# Altium PCB WiF14Tao.PcbDoc
Units mil, origin at the board's own origin, x right, y up, seen from the top; angles counter-clockwise.
Board outline 2362.2 x 4724.41 mil, 2 copper layers (TopLayer, BottomLayer); 18 components, 28 nets, 141 pads, 63 vias.
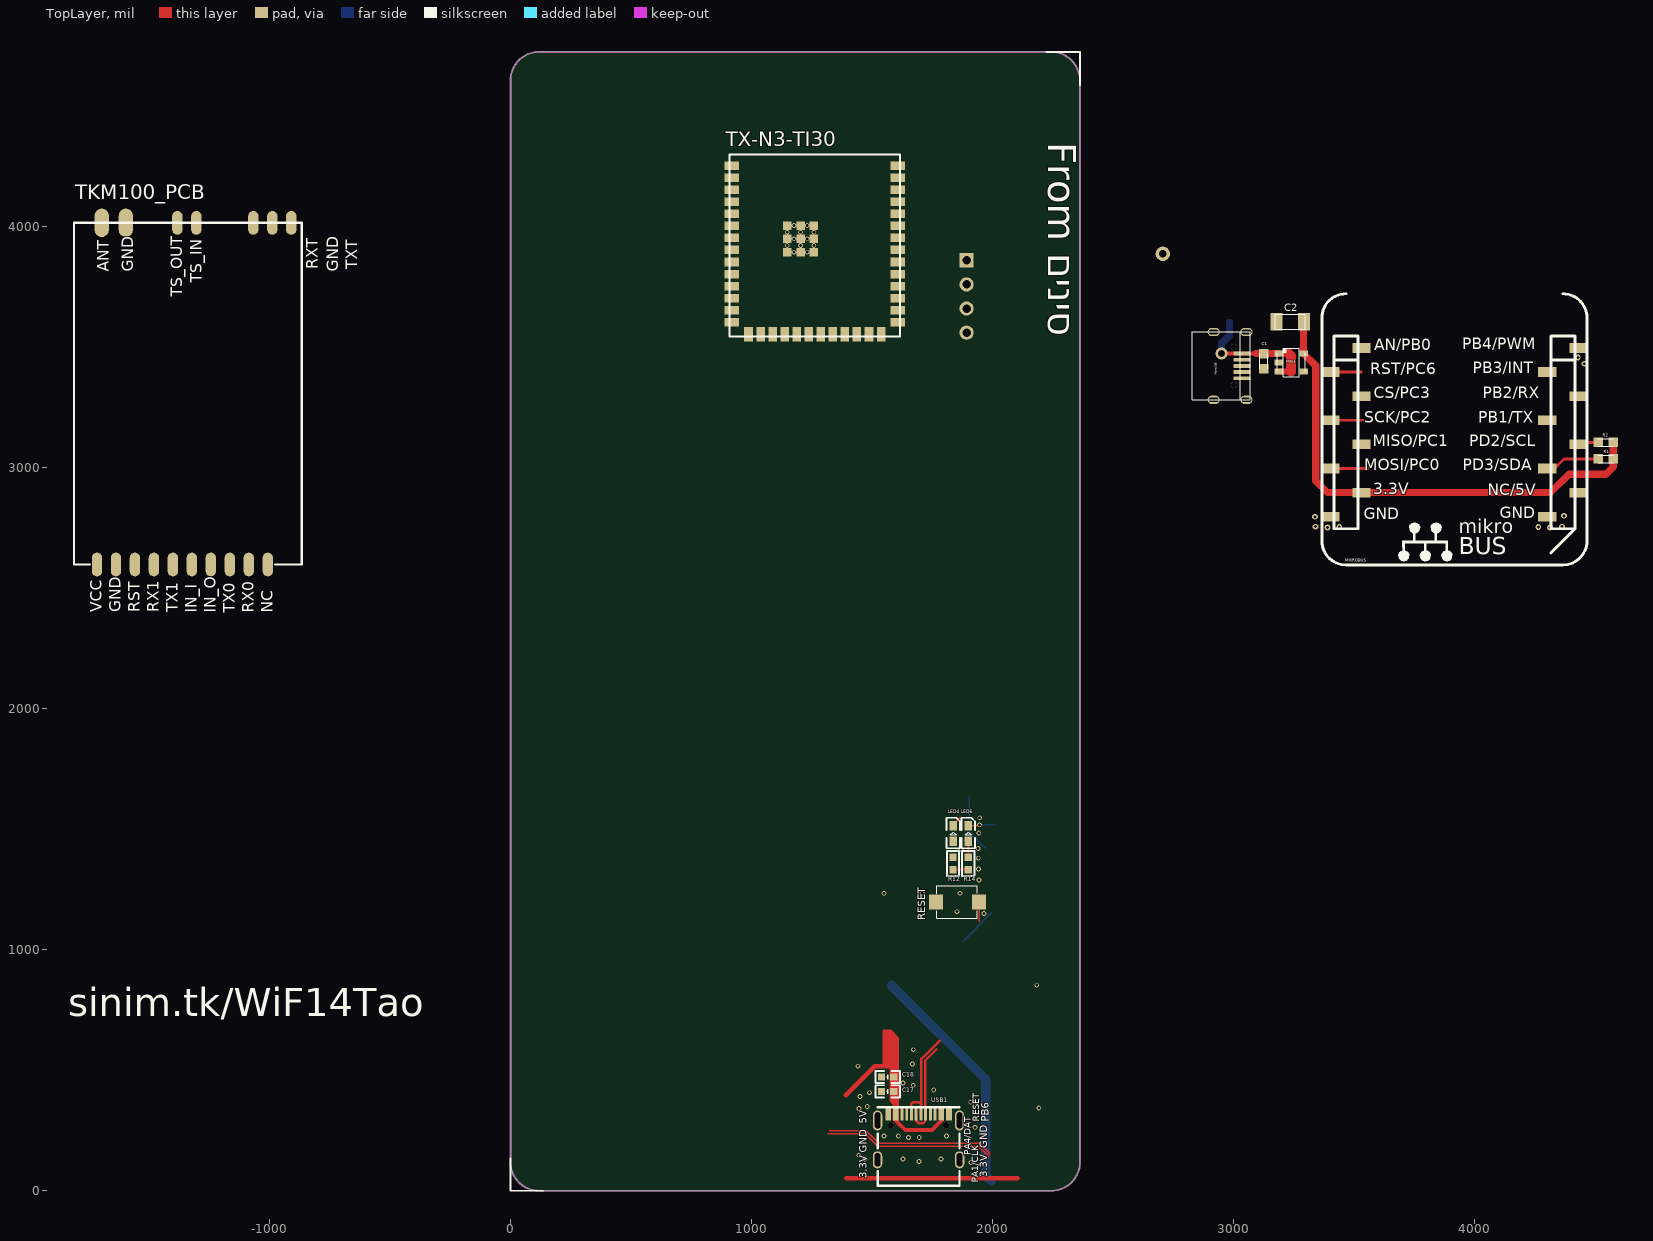
[diagram p0: TopLayer view]
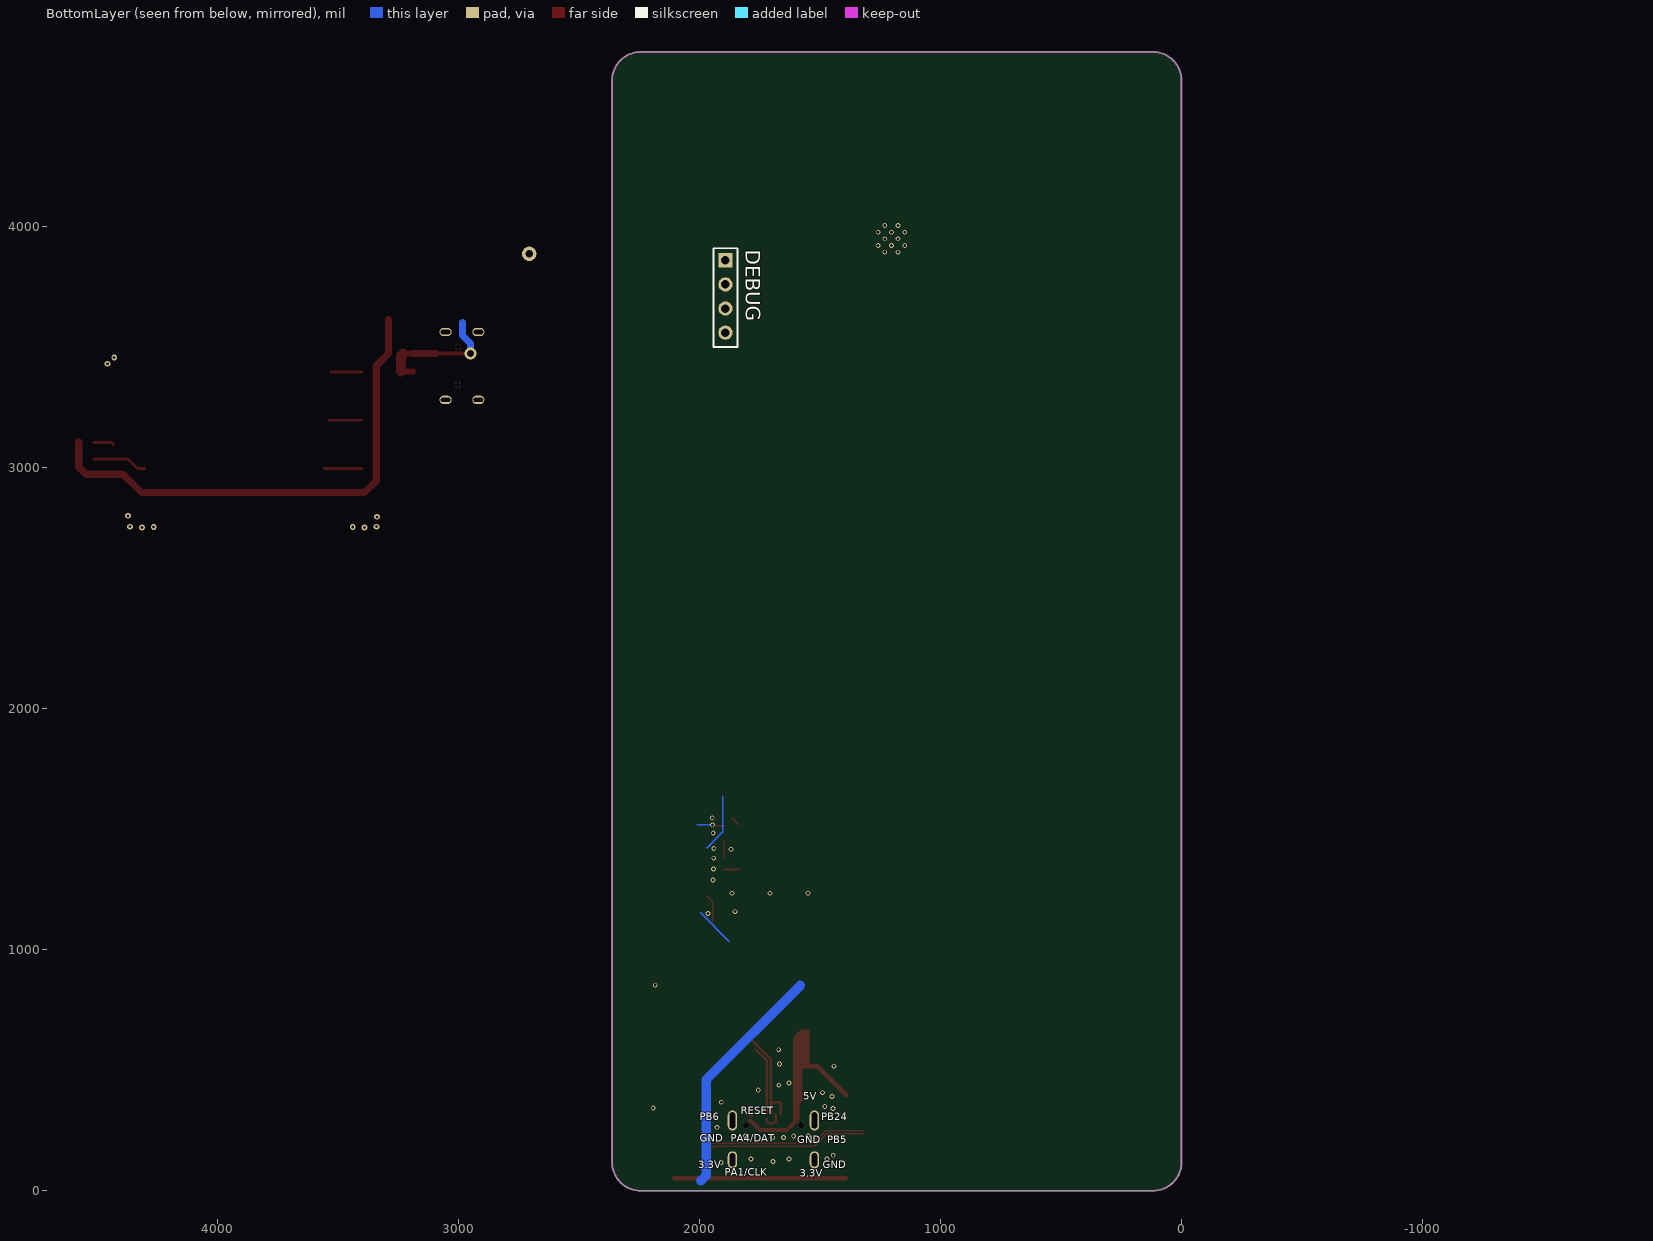
[diagram p1: BottomLayer view, seen from below]

## Layer stack, top to bottom
TopLayer: signal copper 1.4
Dielectric: core 12.6, FR-4, Dk 4.8
BottomLayer: signal copper 1.4

## Board outline
0,118.11 0,4606.3 cw(c118.11,4606.3) 118.11,4724.41 2244.09,4724.41 cw(c2244.09,4606.3) 2362.2,4606.3 2362.2,118.11 cw(c2244.09,118.11) 2244.09,0 118.11,0 cw(c118.11,118.11)

## Design rules (kind name [scope] priority, off if disabled: settings)
Clearance Clearance_1 [(InPoly) vs (IsWire) Or (IsPad) Or (IsVia) Or (IsFill) Or (InPoly)] p1: gap=10
Clearance [All] p2: gap=6
Clearance Clearance_2 [Inpoly vs InNet('NetC17_1')] p3: gap=12
ComponentClearance [All] p1 off: gap=10 collisioncheckmode=3 verticalgap=10 showdistances=FALSE
FabricationTestPointUsage TestPointUsage [All] p1: valid=0 allowmultiple=FALSE
FabricationTestpoint Testpoint [All] p1: side=3 testpointundercomponent=TRUE minsize=40 maxsize=100 preferedsize=60 minholesize=20 maxholesize=40 preferedholesize=32 testpointgrid=1 allowsidetop=TRUE allowsidebottom=TRUE usegrid=TRUE gridtolerance=0.01
FanoutControl Fanout_Default [All] p1: bgadir=Out bgaviamode=Centered fanoutstyle=Auto fanoutdirection=Alternating viagrid=1 // Fanout_Default (Default Rule)
FanoutControl Fanout_Small [(CompPinCount < 5)] p2: bgadir=Out bgaviamode=Centered fanoutstyle=Auto fanoutdirection=OutThenIn viagrid=1 // Fanout_Small (Default Rule)
FanoutControl Fanout_LCC [IsLCC] p4: bgadir=Out bgaviamode=Centered fanoutstyle=Auto fanoutdirection=Alternating viagrid=1 // Fanout_LCC (Default Rule)
FanoutControl Fanout_BGA [IsBGA] p5: bgadir=Out bgaviamode=Centered fanoutstyle=Auto fanoutdirection=Alternating viagrid=1 // Fanout_BGA (Default Rule)
PolygonConnect PolygonConnect_Via [ISVIA] p1: connectstyle=Direct reliefconductorwidth=10 reliefentries=4 polygonreliefangle="90 Angle"
PolygonConnect [All] p2: connectstyle=Direct reliefconductorwidth=21 reliefentries=4 polygonreliefangle="90 Angle"
RoutingPriority [All] p1: routingpriority=4
RoutingVias [All] p1: holewidth=16 width=26 viastyle="Through Hole" minholewidth=12 minwidth=18 maxholewidth=28 maxwidth=50
SilkscreenOverComponentPads [IsPad] p1: minsilkscreentomaskgap=10
SolderMaskExpansion Ispad2 [ispad] p1: expansion=0
SolderMaskExpansion IsPad [IsPad] p2: expansion=0
SolderMaskExpansion via [isvia] p3: expansion=-20
Width [All] p1: maxlimit=100 minlimit=6 preferedwidth=10
19 further rules are at their usual default settings.

## Classes and differential pairs
component class ΖΥΓΟΝ_M220P: C1 C2 MICROUSB MIKROBUS R1 R2 RT9013

## Components (designator, comment, footprint, x,y, rotation, side; value= is the part's Value field where it differs from the comment)
C1 "2.2u" 0603 3124.88,3473.16 r270 top
C2 "22uF" 1206 3235,3604.98 r180 top
C17 "0.1uF" "C 0603_L" 1564.59,412 r0 top
C18 "10UF" "C 0603_L" 1564.59,472 r0 top
DEBUG "" DEBUG 1892,3860 r270 bottom
LED4 "" LED0603 1836.5,1482 r90 top
LED6 "" LED0603 1899,1482 r90 top
MicroUSB "" MicroUSB 2844.46,3421.98 r0 top locked
MIKROBUS "" MIKROBUS 3916,3146.39 r0 top
R1 "3k" 0603 4575,3035.98 r180 top
R2 "3k" 0603 4575,3104.98 r180 top
R12 "4.7K" "R 0603_L" 1835.67,1357.59 r90 top
R14 "4.7K" "R 0603_L" 1899,1357.59 r90 top
RESET "SW PUSHBUTTON" 正按小龟 1944,1198.18 r180 top
RT9013 "" SGM2028 3239,3435.98 r270 top
TKM100_PCB "" TKM100_PCB -1811,2598 r0 top
TX-N3-TI30 "" TX-N3-TI30 908,3544 r0 top
USB1 "USB_TYPE_C_16Pin" USB-C-16PIN-1 1521.36,289.26 r0 top

## Footprints (in the part's own frame and the unit in brackets; to place one, negate y for a bottom-side part, rotate by r counter-clockwise, add the part's x,y. Pads: shape width x height; smd on the part's side, far side on the other; paste and mask are expansions set on the pad)
0603 [mm]
  rect 1x1 smd: 1(0,0) 2(1.6,0)
  silkscreen extent 0,-0.4 1.6,0.4
1206 [mm]
  rect 1.3x1.85 smd: 1(-1.45,0) 2(1.45,0)
  silkscreen extent -1.6,-0.8 1.6,0.8
"C 0603_L" [mil]
  rect 30x30 smd: 1(-25.59,0) 2(25.59,0)
  silkscreen extent -51,-26 51,26, body extent -31,-16 31,16, height 32
DEBUG [mm]
  rect 1.5x1.5 hole 0.9: 1(0,0)
  round 1.5 hole 0.9: 2(2.54,0) 3(5.08,0) 4(7.62,0)
  silkscreen extent -1.27,-1.27 9.14,1.27
LED0603 [mm]
  rect 1x0.8 smd: 1(-0.81,0) 2(0.81,0)
  silkscreen extent -1.55,-0.71 1.65,0.71, body extent -0.81,-0.4 0.81,0.4, height 0.6
MicroUSB [mm]
  rect 1.8x0.4 smd: 1(4.85,1.3) 2(4.85,0.65) 3(4.85,0) 4(4.85,-0.65) 5(4.85,-1.3)
  oval 1.27x0.889 hole 0.45 slot 1.016 at 0 deg: o(1.85,-3.575) o(1.85,3.575) o(5.3,-3.575) o(5.3,3.575)
  silkscreen extent -0.4,-3.57 5.7,3.57
MIKROBUS [mm]
  rect 1.9x1.02 smd: 1(-9.78,8.89) 2(-13.08,6.35) 3(-9.78,3.81) 4(-13.08,1.27) 5(-9.78,-1.27) 6(-13.08,-3.81) 7(-9.78,-6.35) 8(-13.08,-8.89) 9(9.78,-8.89) 10(13.08,-6.35) 11(9.78,-3.81) 12(13.08,-1.27) 13(9.78,1.27) 14(13.08,3.81) 15(9.78,6.35) 16(13.08,8.89)
  silkscreen extent -13.97,-13.97 13.97,14.6
"R 0603_L" [mil]
  rect 30x30 smd: 1(-25.59,0) 2(25.59,0)
  silkscreen extent -51,-26 51,26, body extent -31,-16 32,16, height 16
SGM2028 [mm]
  rect 0.6x0.9 smd: 1(-0.95,-1.304) 2(0,-1.304) 3(0.95,-1.304) 4(0.95,1.304) 5(-0.95,1.304)
  silkscreen extent -1.51,-1.5 1.51,1.5
TKM100_PCB [mm]
  oval 1.1x2.5 smd: 1(2.426,0) 2(4.426,0) 3(6.426,0) 4(8.426,0) 5(10.426,0) 6(12.426,0) 7(14.426,0) 8(16.426,0) 9(18.426,0) 10(20.426,0) 11(22.9,36) 12(20.9,36) 13(18.9,36) 14(12.9,36) 15(10.9,36)
  oval 1.5x3 smd: 16(5.465,36) 17(2.925,36)
  silkscreen extent 0,0 24,36
TX-N3-TI30 [mm]
  rect 0.9x0.9 smd: 0(6.1,8.89) 0(6.1,10.29) 0(6.1,11.69) 0(7.5,8.89) 0(7.5,10.29) 0(7.5,11.69) 0(8.9,8.89) 0(8.9,10.29) 0(8.9,11.69)
  rect 1.5x0.9 smd: 1(0.25,18.01) 2(0.25,16.74) 3(0.25,15.47) 4(0.25,14.2) 5(0.25,12.93) 6(0.25,11.66) 7(0.25,10.39) 8(0.25,9.12) 9(0.25,7.85) 10(0.25,6.58) 11(0.25,5.31) 12(0.25,4.04) 13(0.25,2.77) 14(0.25,1.5) 27(17.75,1.5) 28(17.75,2.77) 29(17.75,4.04) 30(17.75,5.31) 31(17.75,6.58) 32(17.75,7.85) 33(17.75,9.12) 34(17.75,10.39) 35(17.75,11.66) 36(17.75,12.93) 37(17.75,14.2) 38(17.75,15.47) 39(17.75,16.74) 40(17.75,18.01)
  rect 0.9x1.5 smd: 15(2.015,0.25) 16(3.285,0.25) 17(4.555,0.25) 18(5.825,0.25) 19(7.095,0.25) 20(8.365,0.25) 21(9.635,0.25) 22(10.905,0.25) 23(12.175,0.25) 24(13.445,0.25) 25(14.715,0.25) 26(15.985,0.25)
  silkscreen extent 0,0 18,19.2
USB-C-16PIN-1 [mm]
  oval 1x2.099 hole 0.6 slot 1.7 at 90 deg: 1(0.034,0.061) 2(8.674,0.061)
  oval 1x1.799 hole 0.6 slot 1.4 at 90 deg: 3(0.034,-4.088) 4(8.674,-4.088)
  rect 0.6x1.35 smd: A1B12(1.154,0.736) A4B9(1.954,0.736) B1A12(7.554,0.736) B4A9(6.754,0.736)
  rect 0.3x1.35 smd: A5(3.104,0.736) A6(4.104,0.736) A7(4.604,0.736) A8(2.604,0.736) B5(6.104,0.736) B6(5.104,0.736) B7(3.604,0.736) B8(5.604,0.736)
  round 0.65 hole 0.65 unplated: ""(1.464,-0.438) ""(7.244,-0.438)
  silkscreen extent 0.04,-6.81 8.67,1.45
正按小龟 [mm]
  rect 1.5x1.6 smd: 1(0,0) 2(4.55,0)
  silkscreen extent 0.2,-1.7 4.48,1.73

## Part data
C1 C2: library part C
C17 C18: library part Cap, "Cap"
MicroUSB: library part MICROUSB
MIKROBUS: library part MIKROBUS
R1 R2: library part R
R12 R14: library part Res1, "Resisto"
RT9013: library part SGM2028

## Free pads (board coordinates)
  round 60 hole 30: 0(2706,3887)

## Via types
v1: diameter 19.68, hole 11.81, TopLayer to BottomLayer, tented both sides, 38 vias
v2: diameter 19.68, hole 11.81, TopLayer to BottomLayer, 12 vias
v3: diameter 24, hole 12, TopLayer to BottomLayer, 10 vias
v4: diameter 25.59, hole 25.59, TopLayer to BottomLayer, 2 vias
v5: diameter 50, hole 28, TopLayer to BottomLayer, 1 vias

## Nets (pads, with @x,y where several pads share a name; then routed paths per layer and width w, separated by ;. In a path a pad name is that pad's centre, name@x,y a point inside that pad or via, vN(x,y) a via of type N, cw(c..) or ccw(c..) an arc to the next point about the centre after c; other vN are vias at no path point)
5V: C1.1 MicroUSB.1 RT9013.1 RT9013.3 | length 548.3
  TopLayer w15.75: v5@2950,3473.16 MicroUSB.1 3094,3472.98
  TopLayer w23.62: RT9013.3 3238,3398.58 ; RT9013.1 3228.6,3473.38
  TopLayer w30: 3094,3473.38 RT9013.1
  TopLayer w40: 3228.6,3473.38 3238,3463.98 3238,3398.58
  BottomLayer w30: v5(2950,3473.98) 2950,3514.98 2983,3547.98 2983,3600.98
GND: C1.2 C2.2 MicroUSB.5 MicroUSB.o MIKROBUS.8 MIKROBUS.9 RT9013.2
  other v3: 3390,2751.98 4312.08,2751.98 3438,2753.98 4264.08,2753.98 3340,2754.98 4362.08,2754.98 3338,2795.98 4370,2799.98
PA0: 
PA4: 
PA7: 
PA8: 
PB0: MIKROBUS.1
PB1: MIKROBUS.13
PB2: MIKROBUS.14
PB3: MIKROBUS.15
PB4: MIKROBUS.16
PC0: MIKROBUS.6 | length 155.4
  TopLayer w12: MIKROBUS.6 3556.41,2996.39
PC1: MIKROBUS.5
PC2: MIKROBUS.4 | length 133.4
  TopLayer w12: MIKROBUS.4 3534.41,3196.39
PC3: MIKROBUS.3
PC6: MIKROBUS.2 | length 128.4
  TopLayer w12: MIKROBUS.2 3529.41,3396.39
PC7: pad.0
PD2: MIKROBUS.12 R2.2 | length 84.6
  TopLayer w12: MIKROBUS.12 4439.55,3104.98 R2.2
PD3: MIKROBUS.11 R1.2 | length 227.4
  TopLayer w12: MIKROBUS.11 4331.41,2996.39 4371,3035.98 R1.2
PTI_DATA: 
PTI_FRAME: 
RST: 
SWCLK: 
SWDIO: 
SWO: 
UART_RX: 
  other v3: 4428,3456.98
UART_TX: 
  other v3: 4456,3430.98
VCC: C2.1 MIKROBUS.7 R1.1 R2.1 RT9013.5 | length 2093
  TopLayer w30: C2.1@3290.34,3614.23 C2.1@3290.34,3603.23 ; C2.1 C2.1@3290.34,3603.23 ; R2.1 R1.1 4575,3002.98 4545,2972.98 4391,2972.98 4314.41,2896.39 MIKROBUS.7 3389.59,2896.39 3341,2944.98 3341,3422.72 RT9013.5 C2.1@3290.34,3603.23
pads on no net: C17.1 C17.2 C18.1 C18.2 DEBUG.1 DEBUG.2 DEBUG.3 DEBUG.4 LED4.1 LED4.2 LED6.1 LED6.2 MicroUSB.2 MicroUSB.3 MicroUSB.4 MIKROBUS.10 R12.1 R12.2 R14.1 R14.2 RESET.1 RESET.2 RT9013.4 TKM100_PCB.1 TKM100_PCB.2 TKM100_PCB.3 TKM100_PCB.4 TKM100_PCB.5 TKM100_PCB.6 TKM100_PCB.7 TKM100_PCB.8 TKM100_PCB.9 TKM100_PCB.10 TKM100_PCB.11 TKM100_PCB.12 TKM100_PCB.13 TKM100_PCB.14 TKM100_PCB.15 TKM100_PCB.16 TKM100_PCB.17 TX-N3-TI30.0 TX-N3-TI30.1 TX-N3-TI30.2 TX-N3-TI30.3 TX-N3-TI30.4 TX-N3-TI30.5 TX-N3-TI30.6 TX-N3-TI30.7 TX-N3-TI30.8 TX-N3-TI30.9 TX-N3-TI30.10 TX-N3-TI30.11 TX-N3-TI30.12 TX-N3-TI30.13 TX-N3-TI30.14 TX-N3-TI30.15 TX-N3-TI30.16 TX-N3-TI30.17 TX-N3-TI30.18 TX-N3-TI30.19 TX-N3-TI30.20 TX-N3-TI30.21 TX-N3-TI30.22 TX-N3-TI30.23 TX-N3-TI30.24 TX-N3-TI30.25 TX-N3-TI30.26 TX-N3-TI30.27 TX-N3-TI30.28 TX-N3-TI30.29 TX-N3-TI30.30 TX-N3-TI30.31 TX-N3-TI30.32 TX-N3-TI30.33 TX-N3-TI30.34 TX-N3-TI30.35 TX-N3-TI30.36 TX-N3-TI30.37 TX-N3-TI30.38 TX-N3-TI30.39 TX-N3-TI30.40 USB1. USB1.1 USB1.2 USB1.3 USB1.4 USB1.A1B12 USB1.A4B9 USB1.A5 USB1.A6 USB1.A7 USB1.A8 USB1.B1A12 USB1.B4A9 USB1.B5 USB1.B6 USB1.B7 USB1.B8
copper on no net: | length 5296
  TopLayer w6: 1316.66,237 1471.7,237 1523.7,185 1533.64,185 1941.42,185 1985.67,140.75 ; 1321.63,249 1476.67,249 1528.67,197 1946.39,197 1990.64,152.75 ; 1836.5,1517.83 1866.38,1547.71 ; 1899,1513.89 1941.64,1513.89 v1(1945.74,1517.99) ; 1944,1116.99 1944,1198.18 1969.72,1223.9
  TopLayer w7.87: 1835.67,1332 1899,1332 ; 1899,1383.19 1899,1450.11
  TopLayer w10: 1663.25,318.26 1663.25,361.14 1669.11,367 1694.76,367 1702.62,359.14 ; 1682.94,318.26 1683.84,317.35 1683.84,289 1692.16,280.68 1713.08,280.68 1719.53,287.12 1719.53,294.81 1722.31,297.59 ; 1702.62,345.69 1702.62,359.14 ; 1722.31,318.26 1721.4,319.16 1721.4,344.57 1720.76,345.21 1720.76,540.27 1767.41,586.92 ; 1781.96,624.1 1704.76,546.9 1704.76,359.14 1704.76,345.69 1703.53,344.45 1703.53,319.16 1702.62,318.26 1702.62,359.14
  TopLayer w15.75: 1598.29,318.26 1602.23,299.28 1604.39,288.86 ccw(c1617.97,291.68) 1606.43,283.98 1608.25,281.25 1637.51,252 1749,252 1779.89,282.89 1779.89,283.05 1789.57,292.72
  TopLayer w19.68: 1391.03,396.09 1511.94,517 1598.45,517 ; 1392.59,52 1894,52 1894.37,51.63 2103.63,51.63 ; 1785.3,314.42 1787.27,318.26
  BottomLayer w6: 1875.72,1033.72 1997.06,1155.06 ; 1902.29,1638.8 1902.29,1488.55 1969.72,1421.12 ; v1(1945.74,1517.99) 2011.01,1517.99
  BottomLayer w39.37: 1581.09,851.91 1971.59,461.41 1971.59,63.78 1994.65,40.72
  other v1: 1910,117 1695,121 1470.97,131.8 1628.45,131.8 1785.93,131.8 1445,147 1651.58,221.39 1695.52,220.74 1549,227 1609,227 1809,227 1927,263 1445.49,341.56 2192,343 1480,350 1909,367 1450,391 1489,407 1756,418 1671,438 1628.45,446.76 1442,517 1668,526 1671.27,585.35 2183,853 1964,1150 1852,1158 1549.71,1234.17 1707.19,1234.17 1864.67,1234.17 1944,1289 1942,1335 1941,1380 1869,1417 1940,1420 1943,1484 1946.23,1547.71
  other v2: 1175.72,3894 1230.83,3894 1148.16,3921.56 1203.28,3921.56 1258.39,3921.56 1175.72,3949.12 1230.83,3949.12 1148.16,3976.68 1203.28,3976.68 1258.39,3976.68 1175.72,4004.24 1230.83,4004.24
  other v4: 3001.94,3343.24 3001.94,3500.72

## Keep-outs
KeepOutLayer:
  the board outline again, w7.87

## Other copper
TopLayer:
  region: 1609.87,291.67 1609.87,297 1611.09,634.91 1579,667 1544,667 1544,562 1544,517 1574,517 1574,372 1586.3,359.7 1586.3,329.04 1586.3,291.67 1604,277 1609,282

## Silkscreen, mask and mechanical layers (free items; w line width, h text height)
TopOverlay:
  lines w7.87: 0,134 0,0 134,0 ; 2224,4724.41 2362.2,4724.41 2362.2,4586.2
  text "From םיניס" at 2192,4350 h200 r270
  text "sinim.tk/WiF14Tao" at -1834,684 h200
  text "RESET" at 1954,287 h47.24 r90
  text "PB6" at 1994,287 h51.18 r90
  text "5V" at 1489,277 h51.18 r90
  text "GND" at 1989,177 h51.18 r90
  text "GND" at 1489,157 h51.18 r90
  text "PA4/DAT" at 1918.94,147.75 h47.24 r90
  text "3.3V" at 1989,57 h51.18 r90
  text "3.3V" at 1489,52 h51.18 r90
  text "PA1/CLK" at 1951.73,33.48 h47.24 r90
BottomOverlay:
  text "5V" at 1569.41,367.41 h51.18
  text "RESET" at 1829,307 h51.18
  text "PB24" at 1494,282 h51.18
  text "PB6" at 1999,282 h51.18
  text "PA4/DAT" at 1871,192 h51.18
  text "GND" at 1999,192 h51.18
  text "PB5" at 1469,187 h51.18
  text "GND" at 1594,187 h51.18
  text "GND" at 1489,82 h51.18
  text "3.3V" at 2004,82 h51.18
  text "PA1/CLK" at 1894,52 h51.18
  text "3.3V" at 1584,47 h51.18

## Text inside footprints (layer, text, board x,y; h text height)
MIKROBUS: TopOverlay "BUS" at 3933,2614.9 h121.5; TopOverlay "mikro" at 3933,2706.93 h99; TopOverlay "PB4/PWM" at 3949,3474.98 h80; TopOverlay "AN/PB0" at 3583,3470.98 h80; TopOverlay "NC/5V" at 4054,2867.98 h80; TopOverlay "GND" at 4104,2772.98 h80; TopOverlay "PB1/TX" at 4014,3169.98 h80; TopOverlay "PB2/RX" at 4033,3271.98 h80; TopOverlay "PB3/INT" at 3993,3373.98 h80; TopOverlay "PD2/SCL" at 3977,3071.98 h80; TopOverlay "GND" at 3540,2768.98 h80; TopOverlay "3.3V" at 3580,2871.98 h80; TopOverlay "MOSI/PC0" at 3541,2971.98 h80; TopOverlay "SCK/PC2" at 3542,3169.98 h80; TopOverlay "MISO/PC1" at 3578,3072.98 h80; TopOverlay "CS/PC3" at 3582,3271.98 h80; TopOverlay "RST/PC6" at 3566,3371.39 h80; TopOverlay "PD3/SDA" at 3951,2971.98 h80
TKM100_PCB: TopOverlay "TS_IN" at -1281,3768 h47.24 r90; TopOverlay "ANT" at -1666,3813 h47.24 r90; TopOverlay "GND" at -1566,3813 h47.24 r90; TopOverlay "TXT" at -636,3823 h47.24 r90; TopOverlay "GND" at -715,3813 h47.24 r90; TopOverlay "RXT" at -800,3823 h47.24 r90; TopOverlay "RX0" at -1065.13,2398.2 h47.24 r90; TopOverlay "TX0" at -1144.25,2398.2 h47.24 r90; TopOverlay "TX1" at -1379.5,2400.33 h47.24 r90; TopOverlay "VCC" at -1696,2400.33 h47.24 r90; TopOverlay "GND" at -1616.88,2400.33 h47.24 r90; TopOverlay "RST" at -1537.75,2400.33 h47.24 r90; TopOverlay "RX1" at -1458.62,2400.33 h47.24 r90; TopOverlay "IN_I" at -1302.5,2398.2 h47.24 r90; TopOverlay "IN_O" at -1223.38,2398.2 h47.24 r90; TopOverlay "NC" at -986,2398.2 h47.24 r90; TopOverlay "TS_OUT" at -1361,3708 h47.24 r90